# Altium PCB Solar Battery Charger.PcbDoc
Units mm, origin at the board's own origin, x right, y up, seen from the top; angles counter-clockwise.
Board outline 28.96 x 7.62 mm, 2 copper layers (Top Layer, Bottom Layer); 9 components, 7 nets, 25 pads, 8 vias.
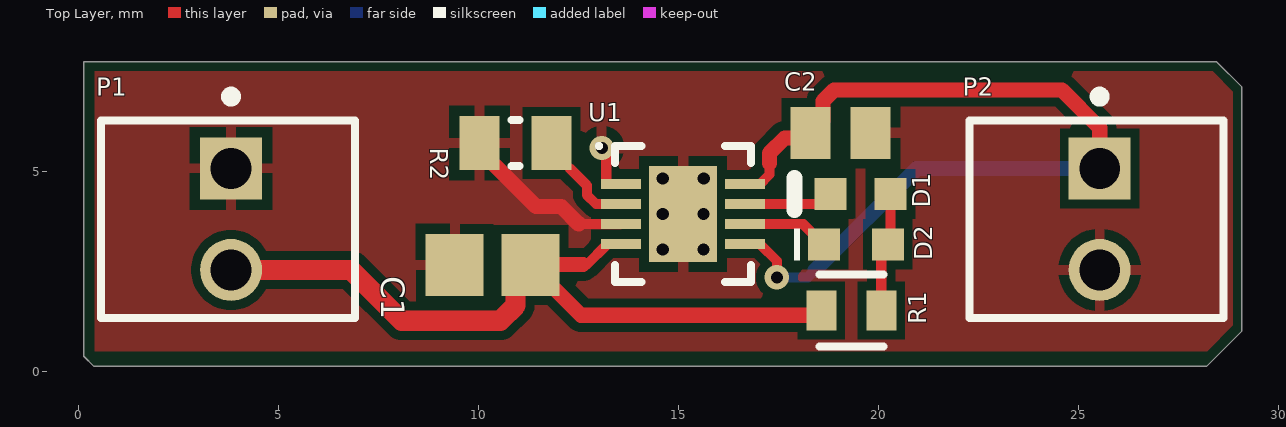
[diagram p0: Top Layer view]
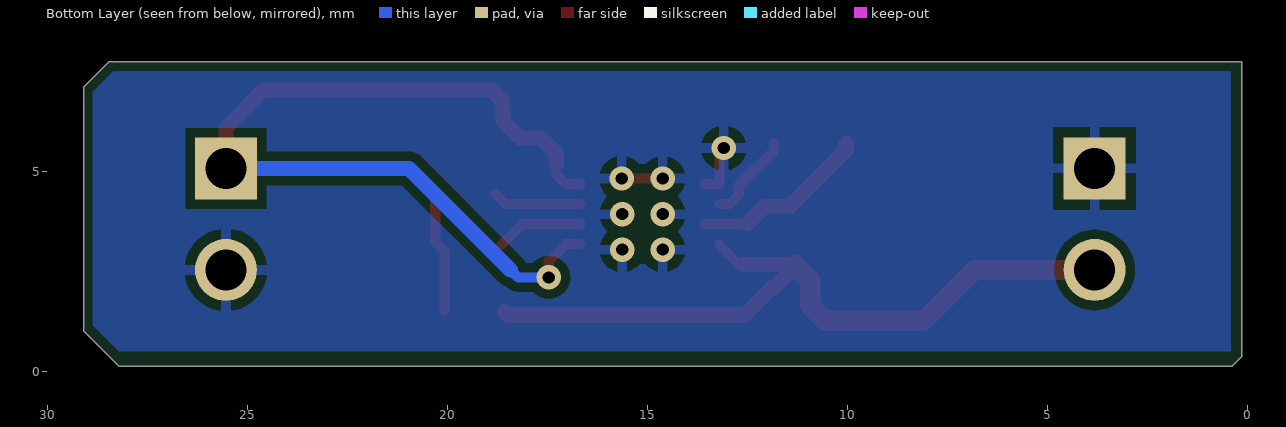
[diagram p1: Bottom Layer view, seen from below]
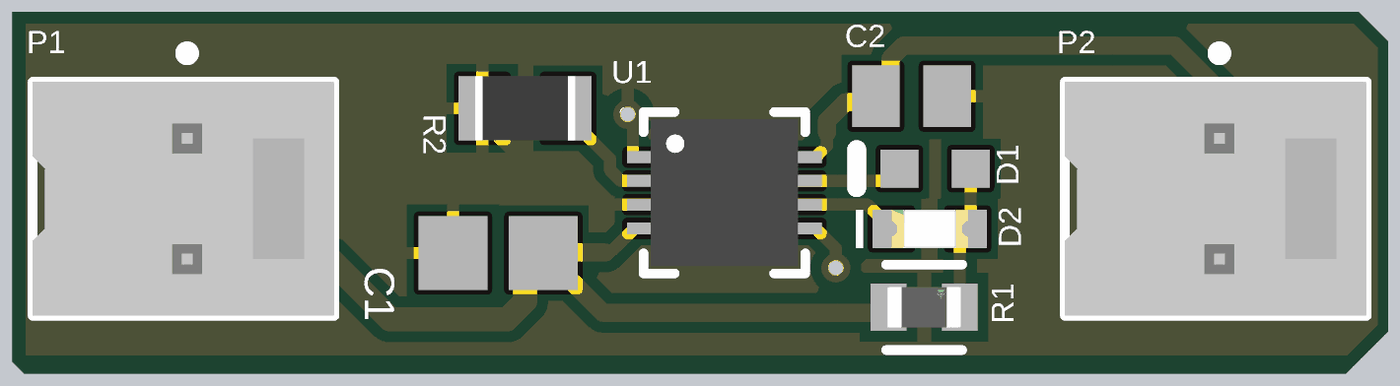
[diagram p2: 3D render of the assembled board from above, using the file's embedded part models]

## Layer stack, top to bottom
Top Solder: solder mask 0.0102, Solder Resist, Dk 3.5
Top Layer: signal copper 0.0356
Dielectric 1: dielectric 0.32, FR-4, Dk 4.8
Bottom Layer: signal copper 0.0356
Bottom Solder: solder mask 0.0102, Solder Resist, Dk 3.5

## Board outline
0.127,0.381 0.381,0.127 28.194,0.127 29.083,1.016 29.083,7.112 28.448,7.747 0.127,7.747

## Design rules (kind name [scope] priority, off if disabled: settings)
Clearance [All] p1: gap=0.229 ignorepadtopadclearanceinfootprint=TRUE except(0: Arc-Hole Track-Hole SMDPad-Hole THPad-Hole Via-Hole Fill-Hole Poly-Hole Region-Hole Text-Hole)
PolygonConnect [All] p1: connectstyle=Relief reliefconductorwidth=0.254 reliefentries=4 polygonreliefangle="90 Angle" airgapwidth=0.254
RoutingVias [All] p1: holewidth=0.305 width=0.61 viastyle="Through Hole" minholewidth=0.305 minwidth=0.61 maxholewidth=0.305 maxwidth=0.61
SolderMaskExpansion [All] p1: expansion=0.102 istentingtop=FALSE
Width [All] p1: maxlimit=0.762 minlimit=0.254 preferedwidth=0.254
30 further rules are at their usual default settings.

## Components (designator, comment, footprint, x,y, rotation, side; value= is the part's Value field where it differs from the comment)
C1 "22uF-10V" CAPC2013X95X45ML15T25 10.353,2.667 r0 top
C2 "4.7uF-10V" CAPC2013X95X45LL10T25 19.05,5.969 r0 top
D1 "RED" AVAG-HSMX-C190_V 19.546,4.445 r180 top
D2 "GREEN" WL-SMCW_0603_150060xx75000 19.431,3.175 r0 top
P1 "SP_CONN" MOLX-22-23-2021_V 3.81,3.81 r270 top
P2 "BAT_CONN" MOLX-22-23-2021_V 25.527,3.81 r270 top
R1 "330R" FP-CRCW0603-e3-MFG 19.316,1.524 r0 top
R2 "10k" RESC2013X60X35NL10T20 10.922,5.715 r180 top
U1 "CN3065" CONS-DFN-8_M 15.113,3.937 r0 top

## Footprints (in the part's own frame and the unit in brackets; to place one, negate y for a bottom-side part, rotate by r counter-clockwise, add the part's x,y. Pads: shape width x height; smd on the part's side, far side on the other; paste and mask are expansions set on the pad)
AVAG-HSMX-C190_V [mm] "SMD, 2-Leads, Body 1.6x0.8mm, Height 0.9mm"
  rect 0.8x0.8 smd: 1(-0.75,0) 2(0.75,0)
  silkscreen extent 1.65,-0.4 1.65,0.4, body extent -0.8,-0.4 0.8,0.4, height 0.9
CAPC2013X95X45LL10T25 [mm] "Chip Capacitor, 2-Leads, Body 2.00x1.25mm, IPC High Density"
  rect 1x1.3 smd: 1(-0.75,0) 2(0.75,0)
  body extent -1.05,-0.67 1.05,0.68, height 0.95
CAPC2013X95X45ML15T25 [mm] "Chip Capacitor, 2-Leads, Body 2.00x1.25mm, IPC Low Density"
  rect 1.45x1.55 smd: 1(-0.95,0) 2(0.95,0)
  body extent -1.08,-0.7 1.07,0.7, height 0.95
CONS-DFN-8_M [mm] "SON, 8-Leads, Body 3.1x3.1mm, Pitch 0.5mm, Thermal Pad 2.4x1.7mm, IPC Low Density"
  rect 1x0.25 smd: 1(-1.55,0.75) 2(-1.55,0.25) 3(-1.55,-0.25) 4(-1.55,-0.75) 5(1.55,-0.75) 6(1.55,-0.25) 7(1.55,0.25) 8(1.55,0.75)
  rect 1.7x2.4 smd: 9(0,0)
  silkscreen extent -2.15,-1.7 1.7,1.75, body extent -1.55,-1.55 1.55,1.55, height 0.9
FP-CRCW0603-e3-MFG [mm]
  rect 0.75x1 smd paste+0 mask+0: 1(-0.75,0) 2(0.75,0)
  silkscreen extent -0.8,-0.9 0.8,0.9, body extent -1.22,-0.6 1.22,0.6, height 0.25
MOLX-22-23-2021_V [mm] "THD, 2-Leads, Body 6.35x4.93mm, Pitch 2.54mm"
  rect 1.55x1.55 hole 1.02: 1(-1.27,0)
  round 1.55 hole 1.02: 2(1.27,0)
  silkscreen extent -3.19,-3.25 2.46,3.1, body extent -2.46,-3.25 2.46,3.1, height 10.66
RESC2013X60X35NL10T20 [mm] "Chip Resistor, 2-Leads, Body 2.1x1.35mm, IPC Medium Density"
  rect 1x1.35 smd: 1(-0.9,0) 2(0.9,0)
  silkscreen extent -0.1,-0.58 0.1,0.58, body extent -1.05,-0.68 1.05,0.67, height 0.6
WL-SMCW_0603_150060xx75000 [mm] "SMD Mono-color Chip LED, body 1.60 x 0.80 mm"
  rect 0.8x0.8 smd: 1(-0.8,0) 2(0.8,0)
  silkscreen extent -1.55,-0.4 -1.4,0.4, body extent -0.8,-0.4 0.8,0.4, height 0.7

## Part data
C1: library part CMP-2007-00096-1, Manufacturer=Murata, Part Number=GRM219R61A226MEA0D
C2: library part CMP-2007-00114-1, Manufacturer=Murata, Part Number=GRM219R61A475KE34J
D1: library part CMP-1744-00004-1, "LED Uni-Color Red, 65 mW, 20 mA, -40 to 85 degC, 2-Pin SMD, RoHS, Tape and Reel", Current Rating="1 A", Max Operating Temperature="85 degC", Min Operating Temperature="-30 degC", Package Quantity=2000, ComponentLink1Description="Manufacturer URL", ComponentLink1URL=http://www.avagotech.com/, ComponentLink2Description=Datasheet, ComponentLink2URL=http://docs.avagotech.com/docs/AV02-0551EN, ComponentLink3Description="Package Specification", ComponentLink3URL=http://www.fairchildsemi.com/dwg/MA/MA03D.pdf, Connector Type=USB, Contact Material=Copper, Contact Plating=Gold, DatasheetVersion=Mar-12, Gender=Male, Height="2.8 mm", Lead Pitch="0.65 mm", Length="7.5 mm", Mount="Surface Mount", PackageDescription="2-Pin Surface Mount Device, Body 1.6 x 0.8 mm, Height 0.9 mm", PackageReference=HSMX-C190, Packaging="Tape and Reel", Pins=5, REACH SVHC="No SVHC", RoHSCompliant=true, Width="5.6 mm"
D2: library part CMP-1426-00006-7, "WURTH ELEKTRONIK - 150060VS75000 - LED, Green, SMD, 0603, 30 mA, 2 V, 570 nm", Case Code (Imperial)=0603, Case Code (Metric)=1608, Color=Green, Forward Current=100mA, Forward Voltage=2V, Max Junction Temperature (Tj)=95°C, Max Operating Temperature=85°C, Max Reverse Voltage (DC)=5V, Min Operating Temperature=-40°C, Power Dissipation=72mW, Test Current=20mA, Case/Package=0603, Dominant Wavelength=570nm, Height=700µm, Length=1.6mm, Lens Style="Clear, Rectangular", Luminous Intensity=40mcd, Mount="Surface Mount", Number of Pins=2, Packaging="Tape and Reel", Peak Wavelength=572nm, REACH SVHC=Unknown, Reverse Voltage=5V, RoHS=Compliant, Viewing Angle=140°, Wavelength=570nm, Width=800µm
P1 P2: library part CMP-1704-00001-3, "Male Header, Pitch 2.54 mm, 1 x 2 Position, Height 10.67 mm, Tail Length 3.56 mm, 0 to 75 degC, RoHS, Bulk", Max Operating Temperature="75 degC", Min Operating Temperature="0 degC", Package Quantity=3000, PartNumber=22-23-2021, ComponentLink1Description="Manufacturer URL", ComponentLink1URL=http://www.molex.com/, ComponentLink2Description=Datasheet, ComponentLink2URL=https://datasheet.ciiva.com/19454/232266-19454304.pdf, Height="10.67 mm", Length="5.08 mm", Mount="Through Hole", Mounting Technology="Through Hole", PackageDescription="Male Header, Pitch 2.54 mm, 1 x 2 Position, Height 10.67 mm, Tail Length 3.56 mm", Packaging=Bulk, Pins=2, Radiation Hardening=No, REACH SVHC=Unknown, RoHSCompliant=True, Width="6.35 mm"
R1: library part CMP-1012-00454-3, "RES Thick Film, 330Ω, 1%, 0.1W, 100ppm/°C, 0603", Case Code (Imperial)=0603, Case Code (Metric)=1608, Max Operating Temperature=155°C, Max Power Dissipation=100mW, Min Operating Temperature=-55°C, Package Quantity=10, Temperature Coefficient=100ppm/°C, Tolerance=1%, Voltage Rating=75V, Case/Package=0603, Composition="Thick Film", Contact Plating=Tin, Depth=0.85mm, Features="Automotive AEC-Q200", Height=0.45mm, Lead Free="Lead Free", Length=1.55mm, Military Standard=Not, Mount="Surface Mount", Number of Terminations=2, Packaging="Tape and Reel", Power Rating=100mW, Radiation Hardening=No, Resistance=330R, Termination=SMD/SMT, Voltage Rating (DC)=75V, Weight=7.1E-05oz, Width=0.033inch
R2: library part CMP-1659-00013-4, "Chip Resistor, 10 KOhm, +/- 1%, 0.125 W, -55 to 155 degC, 0805 (2012 Metric), RoHS, Tape and Reel", Manufacturer=Yageo, Max Operating Temperature="155 degC", Min Operating Temperature="-55 degC", Package Quantity=5000, Voltage Rating="150 V", ComponentLink1Description="Manufacturer URL", ComponentLink1URL=http://www.yageo.com/, ComponentLink2Description=Datasheet, ComponentLink2URL=http://www.yageo.com/documents/recent/PYu-RC_Group_51_RoHS_L_04.pdf, DatasheetVersion="Rev. 4, 02/2016", Height="0.5 mm", Length="2 mm", Mount="Surface Mount", Mounting Technology="Surface Mount", PackageDescription="2-Pin Surface Mounted Device, Body 2 x 1.25 mm", PackageReference=0805, Packaging="Tape and Reel", Pins=2, REACH SVHC="No SVHC", RoHSCompliant=true
U1: library part CMP-2100-03613-1, "Lithium Ion Battery Charger for Solar-Powered Systems, 4.4 to 6 V, 650 uA, -40 to 85 degC, 8-Pin DFN, RoHS", Manufacturer="Consonance Electronic", Package Description="8-Pin Small Outline No-lead Package, Body 3 x 3 mm, Pitch 0.5 mm", Package Reference=DFN-8, Datasheet URL=http://www.consonance-elec.com/pdf/datasheet/DSE-CN3065.pdf, Datasheet Version="Rev. 1.0, 09/2009", Manufacturer URL=http://www.consonance-elec.com/

## Via types
v1: diameter 0.61, hole 0.305, Top Layer to Bottom Layer, tented both sides, 8 vias

## Nets (pads, with @x,y where several pads share a name; then routed paths per layer and width w, separated by ;. In a path a pad name is that pad's centre, name@x,y a point inside that pad or via, vN(x,y) a via of type N, cw(c..) or ccw(c..) an arc to the next point about the centre after c; other vN are vias at no path point)
GND: C1.1 C2.2 P1.1 P2.2 R2.2 U1.1 U1.3 U1.9 | length 6.8
  Top Layer w0.254: 12.501,3.687 U1.3 ; v1(13.081,5.588) 13.081,5.492 13.19,5.383 13.19,4.689 13.192,4.687 U1.1 ; v1(14.605,4.826) v1(15.63,4.826)
  Top Layer w0.381: R2.2 10.022,5.54 11.433,4.129 12.065,4.129 12.501,3.693 12.501,3.687
  other v1: 14.605,3.048 15.621,3.048 14.605,3.937 15.621,3.937
NetC1_2: C1.2 P1.2 R1.1 U1.4 | length 18.9
  Top Layer w0.254: 12.612,2.678 12.711,2.678 13.19,3.158 U1.4@13.19,3.185
  Top Layer w0.381: C1.2 11.303,2.617 11.837,2.083 11.887,2.083 12.562,1.408 18.478,1.408 R1.1@18.566,1.497 ; C1.2@11.314,2.678 12.612,2.678
  Top Layer w0.508: P1.2 6.808,2.54 8.078,1.27 10.541,1.27 10.922,1.651 10.922,2.286 C1.2
NetC2_1: C2.1 P2.1 U1.5 U1.8 | length 22.4
  Top Layer w0.254: U1.5 17.034,3.187 17.458,2.763 v1(17.458,2.354) ; U1.8 17.034,4.687 17.272,4.925 17.272,5.207
  Top Layer w0.381: 17.272,5.207 17.272,5.461 17.653,5.842 18.173,5.842 C2.1 18.61,6.279 18.61,6.762 18.886,7.038 24.585,7.038 25.527,6.096 P2.1
  Bottom Layer w0.254: v1(17.458,2.354) 18.229,2.354 18.415,2.54
  Bottom Layer w0.381: 18.415,2.54 20.955,5.08 P2.1
NetD1_1: D1.1 D2.2 R1.2 | length 3
  Top Layer w0.254: R1.2 20.066,3.01 D2.2 20.296,3.24 D1.1
NetD1_2: D1.2 U1.7 | length 2.2
  Top Layer w0.254: U1.7 18.538,4.187 D1.2
NetD2_1: D2.1 U1.6 | length 2.2
  Top Layer w0.254: U1.6 18.119,3.687 D2.1
NetR2_1: R2.1 U1.2 | length 2.2
  Top Layer w0.254: R2.1 11.822,5.54 12.707,4.655 12.707,4.415 12.933,4.189 U1.2@13.19,4.189

## Polygon pours and split planes (outlines as drawn)
GND on Top Layer "GND_L01_P004" (solid, remove dead copper, pour order 4): 0.408,7.503 0.408,0.508 28.211,0.508 28.856,1.153 28.856,6.995 28.348,7.503
GND on Bottom Layer "GND_L02_P003" (solid, remove dead copper, pour order 3): 0.408,7.503 0.408,0.508 28.211,0.508 28.856,1.153 28.856,6.995 28.348,7.503

## Silkscreen, mask and mechanical layers (free items; w line width, h text height)
Mechanical 1:
  the board outline again, w0.254